# Altium PCB PCB1.PcbDoc (part 2 of 2)
Units mil, origin at the board's own origin, x right, y up, seen from the top; angles counter-clockwise.
Board outline 2600 x 2600 mil, 4 copper layers (Top Layer, Layer 1, Layer 2, Bottom Layer), stack 68.756 mil thick; 81 components, 85 nets, 321 pads, 126 vias.
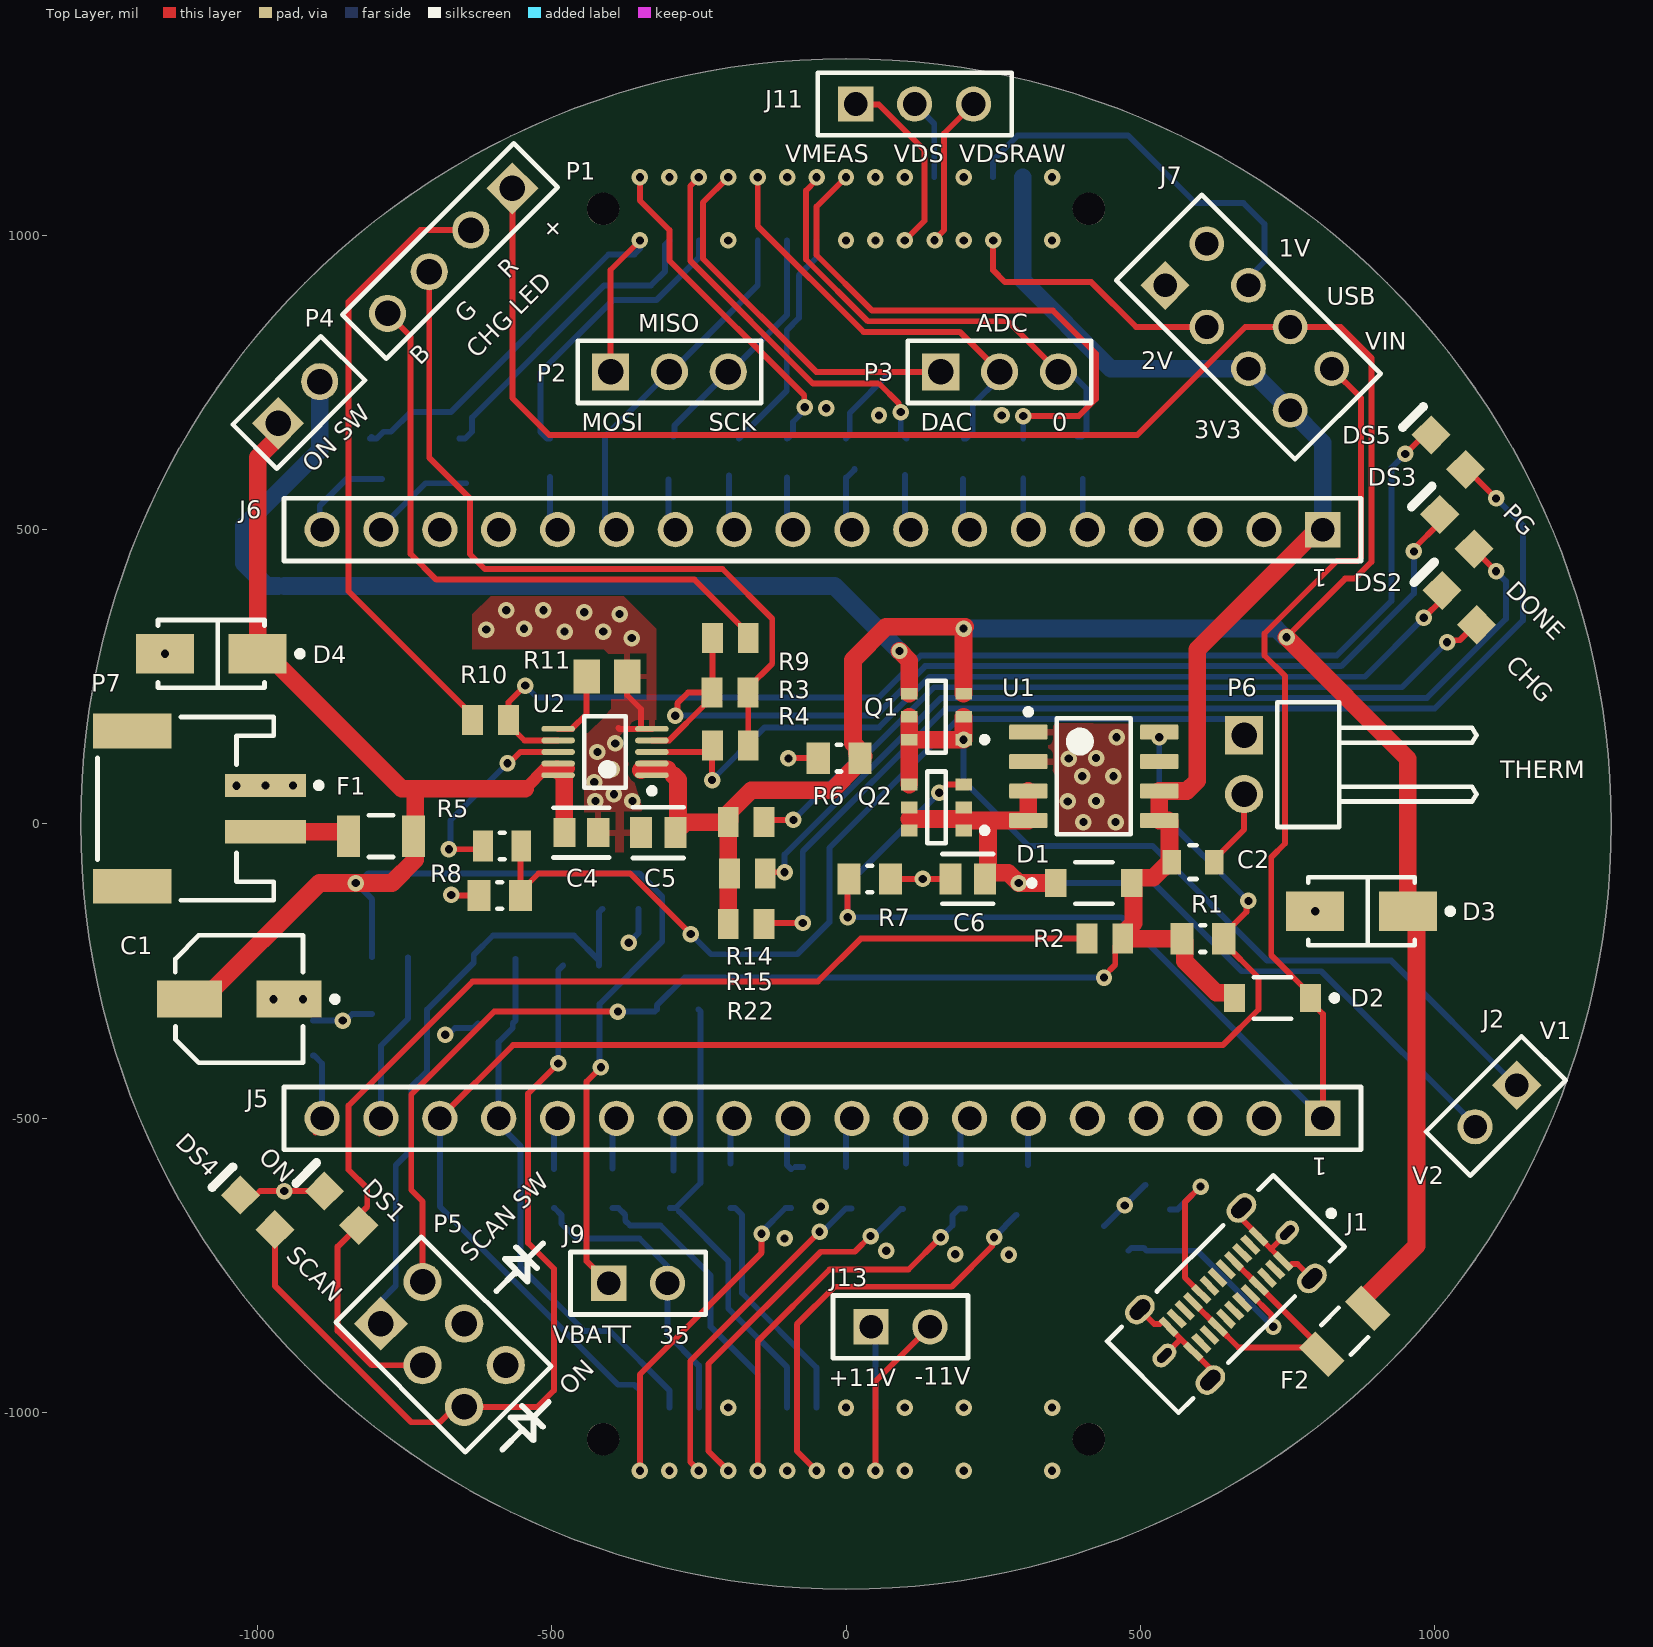
[diagram p0: Top Layer view]

## Via types
v1: diameter 28, hole 14, Top Layer to Bottom Layer, tented both sides, 126 vias

## Nets (pads, with @x,y where several pads share a name; then routed paths per layer and width w, separated by ;. In a path a pad name is that pad's centre, name@x,y a point inside that pad or via, vN(x,y) a via of type N, cw(c..) or ccw(c..) an arc to the next point about the centre after c; other vN are vias at no path point) (continued)
STAT2: DS3.2 R3.2 R9.2 U2.4 | length 1815.7
  Top Layer w10: U2.4 -329.57,142.06 -300.29,142.06 -240.23,202.12 -240.23,210.64 R3.2 ; v1(-290,184) -286.56,187.44 -286.56,204.98 -268.18,223.36 R3.2 ; R9.2 -227.01,223.86 R3.2 ; v1(964.75,463.11) 964.75,467.98 1008.65,511.88 DS3.2
  Bottom Layer w10: v1(-290,184) 50.29,184 134.52,268.23 841.12,268.23 964.75,391.86 v1(964.75,463.11)
V1: J2.1 Q1.1 Q1.2 Q1.5 Q1.6 Q2.4 | length 1466.7
  Top Layer w30: Q2.4 Q1.6 ; Q1.5 Q1.6 ; Q1.2 v1(199.72,143.29) Q1.6
  Bottom Layer w10: v1(199.72,143.29) 199.72,73.24 310,-37.05 520.54,-37.05 715.65,-232.16 926.19,-232.16 J2.1@1136.56,-442.53
V2: C6.1 D1.1 J2.2 Q2.1 Q2.2 Q2.5 Q2.6 U1.3 U1.4 | length 1433
  Top Layer w30: 107.72,8.63 199.72,8.63 202.28,6.06 241.25,6.06 ; U1.3 U1.4 241.25,6.06 ; D1.1 v1(293.44,-100.29) 275.74,-82.6 244.99,-82.6 241.29,-78.9 241.29,6.02 241.25,6.06
  Bottom Layer w10: v1(293.44,-100.29) 293.74,-99.98 522.18,-99.98 672.35,-250.16 807.58,-250.16 J2.2@1086.56,-529.13
VBATT: F1.2 P7.2 | length 161.6
  Top Layer w30: P7.2 -849.69,-13.21 -845.01,-17.9 F1.2 F1.2@-845.01,-36.34
VBATT_FUSED: C1.2 C4.2 D4.1 F1.1 J9.1 P4.1 R18.2 U2.9 U2.10 | length 3164.3
  Top Layer w10: v1(-416.29,-413.31) -440.5,-437.53 -440.5,-742.81 J9.1
  Top Layer w20: -544.99,60.02 -510.64,94.37 -489.1,94.37 -478.63,94.37 -470.56,94.37 -470.39,94.21
  Top Layer w30: C1.2 -1091.67,-297.57 -894.37,-100.28 v1(-832.75,-100.28) -771.13,-100.28 -731.63,-60.79 F1.1@-731.63,-36.34 ; P4.1 -964.76,657.41 -999.53,622.65 D4.1 -983.78,289.07 -754.73,60.02 -731.63,60.02 ; F1.1@-734.77,-36.34 F1.1 ; F1.1@-731.63,-20.59 -731.63,60.02 ; -544.99,60.02 -731.63,60.02 ; -491,93.28 -478.63,80.9 C4.2@-478.63,-10.15
  Bottom Layer w10: R18.2 -805.02,-128.01 v1(-832.75,-100.28) -827.88,-100.28 -811.45,-83.85 -351.31,-83.85 -312.05,-123.11 -312.05,-199.36 -418.5,-305.81 -418.5,-411.1 v1(-416.29,-413.31)
VDS_BUFF: J3.9 J11.2 | length 138.1
  Bottom Layer w10: J11.2 150,1189.57 J3.9
VDS_RAW: J3.10 J11.3 | length 258.3
  Top Layer w10: v1@150,992.28 166.57,1008.85 166.57,1173 J11.3
  other v1: 150.47,991.8
VIN: D2.1 J5.1 J7.8 Q2.3 R7.2 | length 2780.3
  Top Layer w10: v1(2.79,-158.33) 2.79,-95.56 R7.2 ; v1(158.35,53.17) 172.3,67.13 Q2.3 ; J5.1 810,-322.69 788.91,-301.6 D2.1 788.91,-289.6 722.31,-223 722.31,-56.47 745.61,-33.17 745.61,251.62 711,286.23 711,323.68 834.17,446.85 868.91,446.85 874.76,452.71 874.76,723.92 J7.8
  Bottom Layer w10: v1(158.35,53.17) 2.79,-102.39 v1(2.79,-158.33) 468.33,-158.33 J5.1
VMEAS: J3.12 J11.1 | length 316.4
  Top Layer w10: J11.1 17.34,1222.24 55.64,1222.24 133.43,1144.45 133.43,1024.69 v1(100,991.26)
VUSB: C5.2 D3.1 F2.2 J7.6 P1.1 Q1.3 R6.2 R14.2 R15.2 R22.2 U2.1 U2.2 | length 5506.8
  Top Layer w10: P1.1 -566.59,723.37 -504.05,660.83 494.82,660.83 678.27,844.28 J7.6 840.42,844.28 892.76,791.94 892.76,445.25 864.35,416.84 848,416.84 v1(748.39,317.23)
  Top Layer w30: -348.35,91.28 -346.62,93 -303.21,93 ; -293.13,82.93 -285.43,75.23 -285.43,10.5 -285.94,10 C5.2@-285.94,-3.1 ; C5.2 -289.52,-6.69 C5.2@-285.94,-3.1 ; R22.2 -200.1,-83.85 R14.2 ; R6.2 23.64,105.01 -4.54,76.83 -4.54,75.8 -23.29,57.05 -161.03,57.05 -197.37,20.7 -197.37,5.89 R14.2 -271.79,3.18 -277.95,-2.98 -285.82,-2.98 C5.2@-285.94,-3.1 ; R6.2@23.64,117.67 R6.2@23.64,118.79 ; R6.2@29.72,115.18 22.83,115.18 18.14,119.87 18.14,131.1 11.8,137.44 11.8,278.63 68.04,334.87 202.61,334.87 v1(199.72,331.98) Q1.3 ; v1(748.39,317.23) 954.52,111.09 D3.1 969.03,-162.72 969.03,-716.64 877.88,-807.79 877.88,-814.41 F2.2
  Bottom Layer w30: v1(199.72,331.98) 730.85,331.98 745.61,317.23 v1(748.39,317.23)
pads on no net: J1.A2 J1.A3 J1.A6 J1.A7 J1.A8 J1.A10 J1.A11 J1.B2 J1.B3 J1.B6 J1.B7 J1.B8 J1.B10 J1.B11 J3. J4. J5.3 J5.4 J5.5 J6.2 J6.3 J6.4 J6.15 J6.16 P7.MP1 P7.MP2 U1.7

## Polygon pours and split planes (outlines as drawn)
GND on Top Layer "GND_L01_P002" (solid, pour order 2): -409.37,183.32 -438.45,154.24 -444.8,154.24 -444.8,-48.28 -321.8,-48.28 -384.21,149.7 -370.64,163.28 -322.12,163.28 -322.12,332.03 -377.36,387.27 -603.73,387.27 -635,356 -635,296.48 -411.66,296.48 -394.25,279.07 -398.72,274.61 -398.72,195.72 -421.86,172.57
GND on Top Layer "GND_L01_P001" (solid, pour order 1): 269.84,173.56 269.84,85.55 353.45,85.55 357.95,81.06 357.95,-17.36 483.93,-17.36 483.93,170.21
GND on Layer 1 (split plane): 265 vertices, not listed, extent -1279.99,-1279.99 1279.99,1279.99
GND on Layer 2 (split plane): 265 vertices, not listed, extent -1279.99,-1279.99 1279.99,1279.99

## Silkscreen, mask and mechanical layers (free items; w line width, h text height)
Top Overlay:
  lines w10: -593.79,-793.4 -560.39,-760 ; -583.92,-1062.89 -550.53,-1029.5 ; -560.39,-763.97 -560.39,-761.97 -560.39,-758.04 ; -560.39,-718.98 -524.91,-754.46 ; -550.53,-1031.46 -550.53,-1027.53 ; -550.53,-988.47 -515.05,-1023.95 ; -514.9,-712.54 -541.02,-738.67 ; -505.03,-982.03 -531.16,-1008.16 ; -541.02,-738.67 -541.02,-777.41 -579.76,-738.67 -541.02,-738.67 ; -531.16,-1008.16 -569.9,-1008.16 -531.16,-1046.9 -531.16,-1008.16
  text "VMEAS" at -102.99,1124.51 h30
  text "VDS" at 81.46,1124.51 h30
  text "VDSRAW" at 192.43,1124.51 h30
  text "+" at -500.52,990.33 h30 r45
  text "1V" at 735.02,963.69 h30
  text "R" at -573.33,924.89 h30 r45
  text "USB" at 817,881.7 h30
  text "G" at -647.15,848.78 h30 r45
  text "MISO" at -352.57,835.93 h30
  text "ADC" at 221.57,835.93 h30
  text "VIN" at 881.71,805.86 h30
  text "CHG LED" at -627.48,789.22 h30 r45
  text "B" at -722.96,778 h30 r45
  text "2V" at 501.82,772.22 h30
  text "MOSI" at -448.91,667.83 h30
  text "SCK" at -233.23,667.83 h30
  text "DAC" at 127.25,667.83 h30
  text "0" at 350.18,667.83 h30
  text "3V3" at 591.32,654.88 h30
  text "ON SW" at -905.75,595.26 h30 r45
  text "PG" at 1114.24,525.9 h30 r315
  text "DONE" at 1119.24,394.9 h30 r315
  text "CHG" at 1119.24,268.23 h30 r315
  text "THERM" at 1111.34,78.06 h30
  text "V1" at 1178.22,-365.49 h30
  text "ON" at -999.14,-567.72 h30 r315
  text "V2" at 961.52,-611.59 h30
  text "SCAN" at -952.34,-735.34 h30 r315
  text "SCAN SW" at -637.32,-745.7 h30 r45
  text "VBATT" at -498,-882 h30
  text "35" at -316.9,-882.51 h30
  text "-11V" at 117,-952.54 h30
  text "+11V" at -29.42,-955.13 h30
  text "ON" at -469.55,-972.13 h30 r45
Board:
  circle w5: c0,0 r1300
Top 3D Body:
  lines w5: -1173.96,-553.15 1173.96,-553.15 1173.96,553.15 -1173.96,553.15 -1173.96,-553.15

## Text inside footprints (layer, text, board x,y; h text height)
J5: Top Overlay "1" at 817.48,-566.93 h30 r180
J6: Top Overlay "1" at 817.48,433.07 h30 r180